# EAGLE board universal_bc202 (EAGLE 9.6.2)
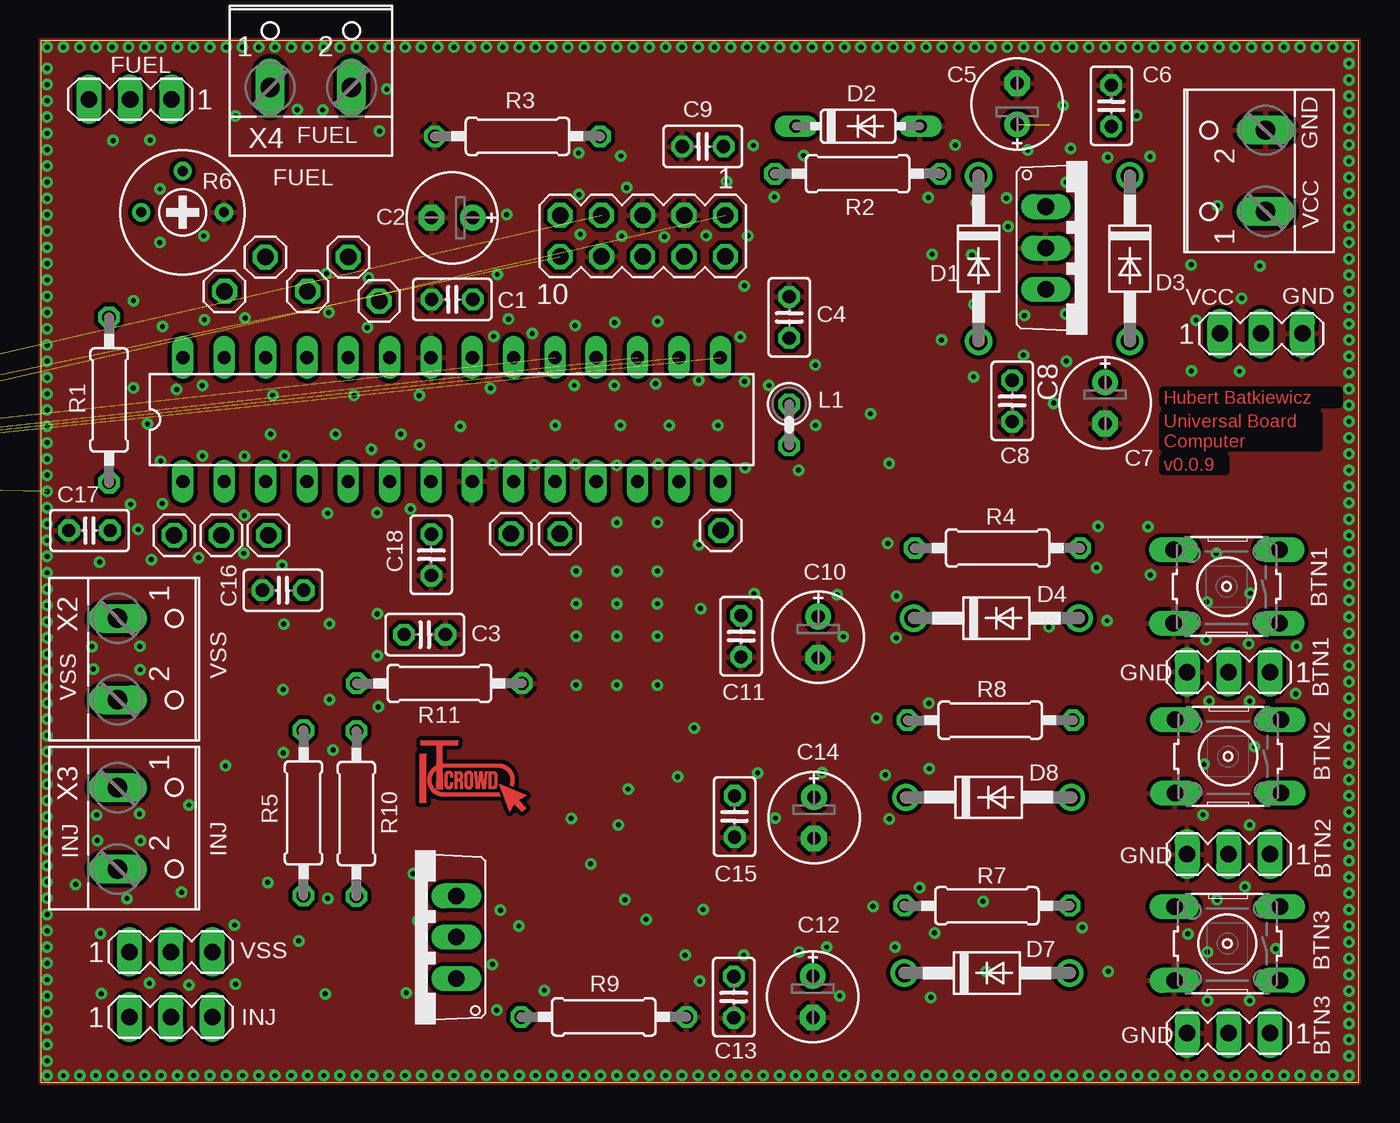
[diagram p0: board, top side]
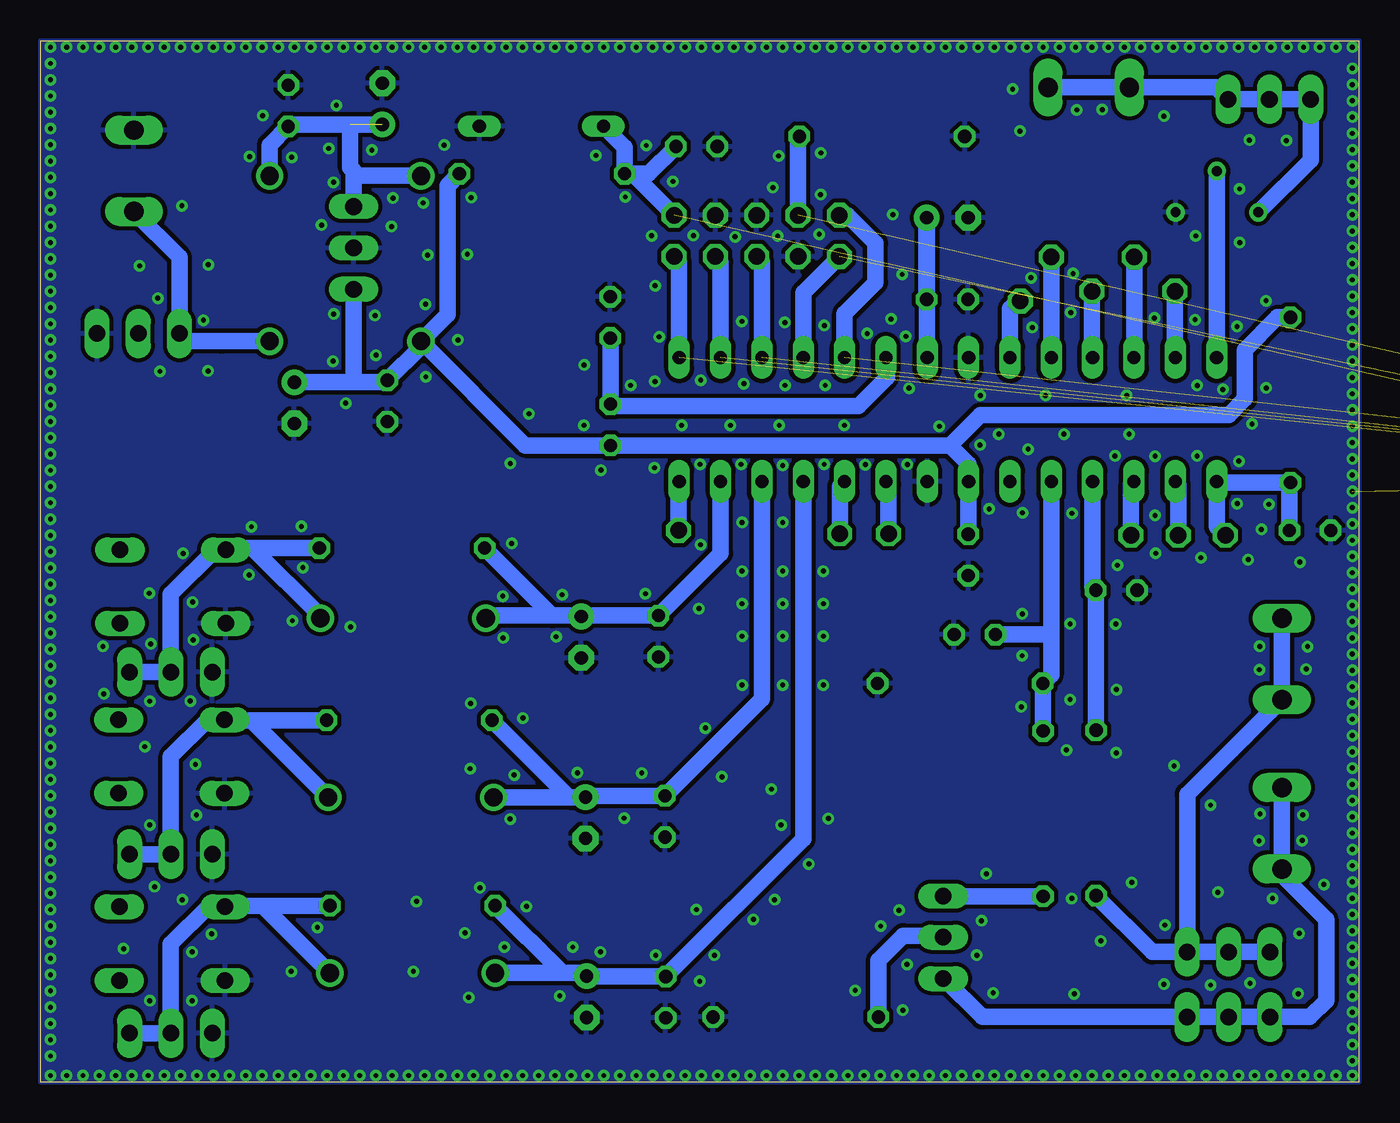
[diagram p1: board, bottom side, seen from below]

Size 81 x 64 mm. Coordinates in mm from the lower left corner, seen from the top.
Outline: 0,0 81,0 81,64 0,64 0,0
Copper layers (1*16): Top 0.035mm / dielectric 1.5mm / Bottom 0.035mm
Design rules "default *": minimum track width 6mil, minimum drill 0.3mm, track to track 10mil, track to pad 10mil, pad to pad 10mil, via to via 10mil, smd to smd 6mil, copper to edge 0mil, drill to drill 10mil, minimum pad ring 10mil, minimum via ring 8mil, stop-mask expansion 4mil, vias tented up to drill 10mil, thermal gap 10mil

## Footprints (pad centres in the part's own frame; a part is rotated, then mirrored left to right if it is on the bottom)
C025-025X050 = drill 0.813 octagon: 1 -1.27,0; 2 1.27,0
E2,5-6E = drill 0.813 pad 1.575: + -1.27,0 | drill 0.813 pad 1.575 octagon: - 1.27,0
DO41-10 = drill 1.118: A 5.08,0; C -5.08,0
DO35-7 = drill 0.813 long: A 3.81,0; C -3.81,0
DIL28-3 = drill 0.813 long: 1 -16.51,-3.81; 2 -13.97,-3.81; 3 -11.43,-3.81; 4 -8.89,-3.81; 5 -6.35,-3.81; 6 -3.81,-3.81; 7 -1.27,-3.81; 8 1.27,-3.81; 9 3.81,-3.81; 10 6.35,-3.81; 11 8.89,-3.81; 12 11.43,-3.81; 13 13.97,-3.81; 14 16.51,-3.81; 15 16.51,3.81; 16 13.97,3.81; 17 11.43,3.81; 18 8.89,3.81; 19 6.35,3.81; 20 3.81,3.81; 21 1.27,3.81; 22 -1.27,3.81; 23 -3.81,3.81; 24 -6.35,3.81; 25 -8.89,3.81; 26 -11.43,3.81; 27 -13.97,3.81; 28 -16.51,3.81
TO220V = drill 1.016 long: 1 -2.54,-2.54; 2 0,-2.54; 3 2.54,-2.54
1X01 = drill 1.016 octagon: 1 0,0
0207/2V = drill 0.813 octagon: 1 -1.27,0; 2 1.27,0
LPH-7366 = smd 0.75 x 4: 1 4,17; 2 3,17; 3 2,17; 4 1,17; 5 0,17; 6 -1,17; 7 -2,17; 8 -3,17; 9 -4,17 | hole 1.5: -17,13; 17,-12.5
0207/10 = drill 0.813 octagon: 1 -5.08,0; 2 5.08,0
RTRIM3339P = drill 0.61: 1 -2.54,0; 2 0,-2.54; 3 2.54,0
B3F-10XX = drill 1.016 long: 1 -3.251,2.261; 2 3.251,2.261; 3 -3.251,-2.261; 4 3.251,-2.261
MA03-1 = drill 1.016 long: 1 -2.54,0; 2 0,0; 3 2.54,0
MA05-2 = drill 1.016 octagon: 1 -5.08,-1.27; 2 -5.08,1.27; 3 -2.54,-1.27; 4 -2.54,1.27; 5 0,-1.27; 6 0,1.27; 7 2.54,-1.27; 8 2.54,1.27; 9 5.08,-1.27; 10 5.08,1.27
W237-102 = drill 1.194 long: 1 -2.5,-1.27; 2 2.5,-1.27

## Placement (x,y rotation side)
C1  100nF  [C025-025X050]  25.29,48.1 180 top
C2  2.2uF  [E2,5-6E]  25.28,53.12 180 top
C3  100nF  [C025-025X050]  23.6,27.5 0 top
C4  100nF  [C025-025X050]  46,47 90 top
C5  470uF  [E2,5-6E]  60.01,60.12 90 top
C6  100nF  [C025-025X050]  65.79,60 90 top
C7  2.2uF  [E2,5-6E]  65.41,41.74 270 top
C8  100nF  [C025-025X050]  59.7,41.86 270 top
C9  100nF  [C025-025X050]  40.69,57.5 180 top
C10  2.2uF  [E2,5-6E]  47.78,27.34 270 top
C11  100nF  [C025-025X050]  43.04,27.4 270 top
C12  2.2uF  [E2,5-6E]  47.45,5.24 270 top
C13  100nF  [C025-025X050]  42.59,5.22 270 top
C14  2.2uF  [E2,5-6E]  47.52,16.24 270 top
C15  100nF  [C025-025X050]  42.64,16.32 270 top
C16  100nF  [C025-025X050]  14.89,30.22 0 top
C17  10nF  [C025-025X050]  3,33.9 180 top
C18  100nF  [C025-025X050]  24,32.4 270 top
D1  1N4004  [DO41-10]  57.63,50.61 270 top
D2  1N4148  [DO35-7]  50.23,58.74 0 top
D3  1N4004  [DO41-10]  66.93,50.61 270 top
D4  1N4004  [DO41-10]  58.73,28.51 0 top
D7  1N4004  [DO41-10]  58.15,6.7 0 top
D8  1N4004  [DO41-10]  58.25,17.5 0 top
IC1  MEGA8-P  [DIL28-3]  25.25,40.72 0 top
IC2  7805TV  [TO220V]  64.31,51.26 270 top
IC3  7810CV  [TO220V]  23,8.9 90 top
JP2  [1X01]  18.9,50.7 0 top
JP4  [1X01]  16.4,48.6 0 top
JP6  [1X01]  13.8,50.7 0 top
JP8  [1X01]  11.3,48.6 0 top
JP10  [1X01]  8.2,33.6 0 top
JP12  [1X01]  41.8,33.9 0 top
JP14  [1X01]  31.9,33.7 0 top
JP16  [1X01]  28.9,33.7 0 top
JP18  [1X01]  14,33.6 0 top
JP20  [1X01]  11.1,33.6 0 top
JP21  [1X01]  20.8,48 0 top
L1  10uH  [0207/2V]  45.99,40.39 270 top
LCD1  LPH-7366  [LPH-7366]  -33.02,20.05 0 top  (outside the outline)
R1  10K  [0207/10]  4.2,41.92 270 top
R2  220R  [0207/10]  50.2,55.82 180 top
R3  10K  [0207/10]  29.3,58.12 180 top
R4  10K  [0207/10]  58.8,32.82 0 top
R5  10K  [0207/10]  16.15,16.54 90 top
R6  100K  [RTRIM3339P]  8.72,53.45 180 top
R7  10K  [0207/10]  58.15,10.84 0 top
R8  10K  [0207/10]  58.35,22.24 0 top
R9  47K  [0207/10]  34.6,4 0 top
R10  10K  [0207/10]  24.5,24.5 0 top
R11  10K  [0207/10]  19.4,16.5 90 top
S1  [B3F-10XX]  72.88,30.45 180 top
S2  [B3F-10XX]  72.92,8.51 180 top
S3  [B3F-10XX]  72.96,20.01 180 top
SV1  [MA03-1]  75,46 0 top
SV2  [MA03-1]  8,8 0 top
SV3  [MA03-1]  8,4 0 top
SV4  [MA05-2]  37,52 180 top
SV5  [MA03-1]  5.5,60.4 180 top
SV6  [MA03-1]  73,14 180 top
SV7  [MA03-1]  73,25.2 180 top
SV8  [MA03-1]  73,3 180 top
X1  [W237-102]  74,56 90 top
X2  [W237-102]  6,26 270 top
X3  [W237-102]  6,15.6 270 top
X4  [W237-102]  16.6,62.4 0 top

## Library data of the parts
C1-C18 = rcl; SPICEPREFIX: C
D1-D4 D7 D8 = diode
IC1 = atmel; OC_FARNELL: unknown; OC_NEWARK: unknown
IC2 IC3 = linear
JP2 JP4 JP6 JP8 JP10 JP12 JP14 JP16 JP18 JP20 JP21 = pinhead
L1 = rcl; SPICEPREFIX: L
LCD1 = lph-7366
R1-R5 R7-R11 = rcl; SPICEPREFIX: R
R6 = rcl; SPICEMODEL: X; SPICEPREFIXL: POT
S1-S3 = switch-omron; MPN: B3F-1000; OC_FARNELL: 176432; OC_NEWARK: 36M3542
SV1-SV8 = con-lstb; OC_FARNELL: unknown; OC_NEWARK: unknown
X1-X4 = con-wago-500; MPN: 237-102; OC_FARNELL: unknown; OC_NEWARK: 70K9898

## Nets
+3V3: C9.1 D2.C LCD1.1 R2.2 SV4.1
CLK: IC1.15 LCD1.2 SV4.2
CS: IC1.18 LCD1.5 SV4.10
D/C: IC1.17 LCD1.4 SV4.6
DIN: IC1.16 LCD1.3 SV4.4
FLOAT: R6.3 SV5.1 SV5.2 SV5.3 X4.1 X4.2
FUEL: IC1.28 R6.2
FUN: C14.+ C15.1 D8.C IC1.12 R8.1
GND: C1.2 C2.- C3.2 C4.2 C5.- C6.2 C7.- C8.2 C9.2 C10.- C11.2 C12.- C13.2 C14.- C15.2 C16.1 C17.2 C18.2 D2.A IC1.8 IC1.22 IC2.2 LCD1.7 R3.2 R6.1 R9.2 R10.2 S1.2 S2.2 S3.2 SV1.3 SV4.3 SV4.5 SV4.8 SV6.3 SV7.3 SV8.3 X1.2
INJECTOR: C3.1 IC1.5 R10.1 R11.2
N$2: C1.1 C2.+ IC1.21
N$3: C4.1 IC1.20 L1.1
N$4: C5.+ C6.1 D1.C D3.C IC2.1
N$7: IC3.1 SV3.1 SV3.2 SV3.3 X3.1 X3.2
N$10: D4.A R4.2 S1.4 SV7.1 SV7.2
N$14: D7.A R7.2 S2.4 SV8.1 SV8.2
N$16: D8.A R8.2 S3.4 SV6.1 SV6.2
N$19: D3.A SV1.1 X1.1
N$20: R5.1 SV2.1 SV2.2 SV2.3 X2.1 X2.2
N$21: IC3.2 R9.1
N$22: IC3.3 R11.1
NEXT: C10.+ C11.1 D4.C IC1.13 R4.1
PB0: IC1.14 JP12.1
PB6: IC1.9 JP16.1
PB7: IC1.10 JP14.1
PC0: IC1.23 JP21.1
PC1: IC1.24 JP2.1
PC2: IC1.25 JP4.1
PC3: IC1.26 JP6.1
PC4: IC1.27 JP8.1
PC6: C17.1 IC1.1 JP10.1 R1.2
PD0: IC1.2 JP20.1
PD1: IC1.3 JP18.1
PREV: C12.+ C13.1 D7.C IC1.11 R7.1
RST: IC1.19 LCD1.9 SV4.9
VCC: C7.+ C8.1 C18.1 D1.A IC1.7 IC2.3 L1.2 R1.1 R2.1
VOUT: LCD1.8 R3.1 SV4.7
VSS: C16.2 IC1.4 R5.2

## Tracks (layer width: path | path; a pad name or v marks a point on that pad's centre or on a via)
+3V3  (1 unrouted)
  Bottom 1.016: D2.C 45.12,57.44 R2.2 | C9.1 43.64,55.82 R2.2 | SV4.1 44.63,55.82 R2.2
CLK  (1 unrouted)
  Bottom 1.016: SV4.2 41.76,50.41 IC1.15
CS  (1 unrouted)
  Bottom 1.016: IC1.18 34.14,48 34.14,48.51 SV4.10
D/C  (1 unrouted)
  Bottom 1.016: IC1.17 36.68,50.41 SV4.6
DIN  (1 unrouted)
  Bottom 1.016: IC1.16 39.22,50.41 SV4.4
FLOAT
  Bottom 1.016: R6.3 2.96,56.67 SV5.3 SV5.2 SV5.1 8.77,61.13 X4.1 X4.2
FUEL
  Bottom 1.016: IC1.28 8.72,44.55 R6.2
FUN
  Bottom 1.016: 48.54,17.51 D8.C | R8.1 48.54,17.51 | 48.54,17.51 C14.+ 47.44,17.59 C15.1 36.68,23.55 IC1.12
GND  (via drill 0.3)  (1 unrouted)
  other vias: 0.4,63.6 1.4,63.6 2.4,63.6 4.4,63.6 3.4,63.6 5.4,63.6 6.4,63.6 7.4,63.6 8.4,63.6 9.4,63.6 10.4,63.6 12.4,63.6 11.4,63.6 13.4,63.6 14.4,63.6 15.4,63.6 16.4,63.6 17.4,63.6 18.4,63.6 20.4,63.6 19.4,63.6 21.4,63.6 22.4,63.6 23.4,63.6 24.4,63.6 25.4,63.6 26.4,63.6 28.4,63.6 27.4,63.6 29.4,63.6 30.4,63.6 31.4,63.6 32.4,63.6 33.4,63.6 34.4,63.6 36.4,63.6 35.4,63.6 37.4,63.6 38.4,63.6 39.4,63.6 40.4,63.6 41.4,63.6 42.4,63.6 44.4,63.6 43.4,63.6 45.4,63.6 46.4,63.6 47.4,63.6 48.4,63.6 49.4,63.6 50.4,63.6 52.4,63.6 51.4,63.6 53.4,63.6 54.4,63.6 55.4,63.6 56.4,63.6 57.4,63.6 58.4,63.6 60.4,63.6 59.4,63.6 61.4,63.6 62.4,63.6 63.4,63.6 64.4,63.6 65.4,63.6 66.4,63.6 68.4,63.6 67.4,63.6 69.4,63.6 70.4,63.6 71.4,63.6 72.4,63.6 73.4,63.6 74.4,63.6 76.4,63.6 75.4,63.6 77.4,63.6 78.4,63.6 79.4,63.6 80.4,63.6 0.4,2.3 0.4,1.3 0.4,3.3 0.4,4.3 0.4,5.3 0.4,6.3 0.4,7.3 0.4,8.3 0.4,10.3 0.4,9.3 0.4,11.3 0.4,12.3 0.4,13.3 0.4,14.3 0.4,15.3 0.4,16.3 0.4,18.3 0.4,17.3 0.4,19.3 0.4,20.3 0.4,21.3 0.4,22.3 0.4,23.3 0.4,24.3 0.4,26.3 0.4,25.3 0.4,27.3 0.4,28.3 0.4,29.3 0.4,30.3 0.4,31.3 0.4,32.3 0.4,34.3 0.4,33.3 0.4,35.3 0.4,36.3 0.4,37.3 0.4,38.3 0.4,39.3 0.4,40.3 0.4,42.3 0.4,41.3 0.4,43.3 0.4,44.3 0.4,45.3 0.4,46.3 0.4,47.3 0.4,48.3 0.4,50.3 0.4,49.3 0.4,51.3 0.4,52.3 0.4,53.3 0.4,54.3 0.4,55.3 0.4,56.3 0.4,58.3 0.4,57.3 0.4,59.3 0.4,60.3 0.4,61.3 0.4,62.3 0.4,0.4 1.4,0.4 2.4,0.4 4.4,0.4 3.4,0.4 5.4,0.4 6.4,0.4 7.4,0.4 8.4,0.4 9.4,0.4 10.4,0.4 12.4,0.4 11.4,0.4 13.4,0.4 14.4,0.4 15.4,0.4 16.4,0.4 17.4,0.4 18.4,0.4 20.4,0.4 19.4,0.4 21.4,0.4 22.4,0.4 23.4,0.4 24.4,0.4 25.4,0.4 26.4,0.4 28.4,0.4 27.4,0.4 29.4,0.4 30.4,0.4 31.4,0.4 32.4,0.4 33.4,0.4 34.4,0.4 36.4,0.4 35.4,0.4 37.4,0.4 38.4,0.4 39.4,0.4 40.4,0.4 41.4,0.4 42.4,0.4 44.4,0.4 43.4,0.4 45.4,0.4 46.4,0.4 47.4,0.4 48.4,0.4 49.4,0.4 50.4,0.4 52.4,0.4 51.4,0.4 53.4,0.4 54.4,0.4 55.4,0.4 56.4,0.4 57.4,0.4 58.4,0.4 60.4,0.4 59.4,0.4 61.4,0.4 62.4,0.4 63.4,0.4 64.4,0.4 65.4,0.4 66.4,0.4 68.4,0.4 67.4,0.4 69.4,0.4 70.4,0.4 71.4,0.4 72.4,0.4 73.4,0.4 74.4,0.4 76.4,0.4 75.4,0.4 77.4,0.4 78.4,0.4 79.4,0.4 80.4,0.4 80.4,2.6 80.4,1.6 80.4,3.6 80.4,4.6 80.4,5.6 80.4,6.6 80.4,7.6 80.4,8.6 80.4,10.6 80.4,9.6 80.4,11.6 80.4,12.6 80.4,13.6 80.4,14.6 80.4,15.6 80.4,16.6 80.4,18.6 80.4,17.6 80.4,19.6 80.4,20.6 80.4,21.6 80.4,22.6 80.4,23.6 80.4,24.6 80.4,26.6 80.4,25.6 80.4,27.6 80.4,28.6 80.4,29.6 80.4,30.6 80.4,31.6 80.4,32.6 80.4,34.6 80.4,33.6 80.4,35.6 80.4,36.6 80.4,37.6 80.4,38.6 80.4,39.6 80.4,40.6 80.4,42.6 80.4,41.6 80.4,43.6 80.4,44.6 80.4,45.6 80.4,46.6 80.4,47.6 80.4,48.6 80.4,50.6 80.4,49.6 80.4,51.6 80.4,52.6 80.4,53.6 80.4,54.6 80.4,55.6 80.4,56.6 80.4,58.6 80.4,57.6 80.4,59.6 80.4,60.6 80.4,61.6 80.4,62.6 74.3,5 71.7,5 71.7,8 70.5,9.1 72.3,11.2 74,12 74.3,15.8 75.9,8.2 65.6,6.8 64,9.5 52.5,8.3 48.3,8.3 49.1,5.3 54.7,5.2 57.9,11.1 58.1,6.8 43.2,7.8 46.6,8 40.5,6.2 39.6,7.8 37.2,10 35.9,11.2 33.8,13.4 32.6,16.2 35.5,15.8 40.7,10.6 36.1,18 35.4,24.4 37.9,24.4 32.9,24.4 32.9,27.4 35.4,27.4 37.9,27.4 37.9,29.4 35.4,29.4 32.9,29.4 32.9,31.4 35.4,31.4 37.9,31.4 37.9,34.4 35.4,34.4 35.4,37.9 37.96,37.97 32.85,37.97 30.33,37.95 27.75,37.96 23.28,39.15 25.78,40.3 22.12,39.82 18.12,39.82 14.12,39.82 14.26,42.19 19.26,42.19 23.26,42.19 8.35,42.56 6.56,40.45 5.69,42.66 7.37,38.16 5.53,35.51 7.47,35.55 9.94,38.48 9.93,42.81 10.06,46.85 12.56,46.96 7.48,46.44 5.7,48.02 7.33,54.89 7.32,51.6 6.72,57.89 4.45,57.86 15.77,59.76 17.33,59.74 11.98,59.36 21.27,61.02 20.82,58.44 28.64,53.31 28.06,49.64 28.75,46.9 20.06,46.37 20.15,49.43 17.56,49.69 17.7,47.29 30.21,46 27.84,45.83 27.64,42.64 31.62,40.36 35.62,40.36 38.62,40.36 41.62,40.36 47.62,40.36 44.75,42.82 40.44,43.13 37.79,42.92 35.26,42.82 32.79,42.82 32.84,46.5 35.27,46.68 37.91,46.75 33.16,52.11 35.71,51.99 38.33,51.95 40.89,52.02 43.46,52.01 43.24,48.94 43,45.8 43.26,43.05 47.61,44.07 55.36,45.61 57.33,43.34 52.14,38.02 51,41.07 46.57,37.61 43.29,37.75 40.48,37.97 20.32,38.9 22.72,35.22 17.63,34.96 14.99,38.48 12.52,38.47 12.52,34.83 12.48,32.5 9.7,32.22 6.8,32.11 5.99,33.96 3.62,31.96 6.09,26.78 6.11,25.34 3.15,26.77 3.23,25.38 11.35,19.44 9.11,17.02 6.07,16.49 6.13,14.83 3.44,16.42 3.48,14.85 2.15,12.15 5.3,11.29 8.66,11.66 11.92,9.65 3.67,9.13 3.73,5.43 6.68,6.07 9.11,5.96 11.98,6.02 23.47,7.8 23.19,9.91 22.47,5.48 17.48,5.42 28.26,10.56 27.76,7.23 29.38,9.59 30.95,5.63 28.02,4.42 22.89,12.8 17.64,11.28 13.95,12.27 15.86,8.68 57.5,54.03 59.35,54.33 57.35,47.8 60.39,44.67 60.46,47.11 62.99,47.2 63.04,44.3 62.26,41.72 54.55,54.36 56.21,57.58 46.88,56.95 43.79,57.56 42.15,55.35 45.08,54.4 33.06,57.1 35.66,56.92 71,46.82 73.8,48.17 73.67,43.68 70.71,43.7 72.32,53.85 70.7,50.23 74.92,50.16 52.6,29.87 52.06,33.11 48.96,29.95 49.32,27.37 52.58,27.3 43.84,30.01 40.45,33.02 40.55,29.1 44.06,18.99 48.01,19.01 51.9,18.87 52.15,16.17 45.15,16.22 39.14,18.76 40.15,21.76 51.15,10.79 54.01,11.94 54.93,9.17 54.61,19.26 54.58,23.28 51.36,22.37 64.89,31.62 68.05,34.13 64.98,34.15 68.2,31.17 65.53,28.35 61.96,27.98 71.66,29.5 74.33,30.04 72.25,32.49 74.23,26.93 71.62,27.18 77.17,26.78 77.12,23.86 74.29,23.41 71.81,23.42 74.6,20.61 71.49,19.53 71.43,16.41 14.83,31.76 14.94,28.15 17.74,28.16 14.89,24.12 17.74,23.51 17.97,20.41 14.9,20.23 20.74,23.06 20.69,26.2 20.68,28.77 20.67,34.99 62.83,60.03 60.65,57.28 63.3,57.38 65.57,56.83 68.17,56.88 67.35,59.4 63.74,52.67 59.44,52.58 63.01,55.3 57.22,50.83 54.78,50.88 33.08,54.54 36.01,54.97 10.02,52
  pour Bottom: 0,64 0,0 81,0 81,64
  pour Top: 0,64 0,0 81,0 81,64
INJECTOR
  Bottom 1.016: IC1.5 18.9,27.5 | 18.9,27.5 18.9,25.02 R10.1 19.42,21.6 R11.2 | C3.1 18.9,27.5
N$2
  Bottom 1.016: IC1.21 26.55,44.56 C2.+ C1.1
N$3
  Bottom 1.016: IC1.20 29,44.47 29,43.3 30.74,41.56 45.89,41.56 L1.1 C4.1
N$4  (1 unrouted)
  Bottom 1.016: C5.+ 61.97,58.85 61.97,56.2 61.77,56 | 62,58.85 65.67,58.85 C6.1 66.93,57.59 D3.C | IC2.1 61.77,56 | D1.C 61.46,55.69 61.77,56
N$7
  Bottom 1.016: IC3.1 25.5,6.36 23.14,4 SV3.3 SV3.2 SV3.1 3,4 2,5 2,10 4.73,12.73 X3.2 X3.1
N$10
  Bottom 1.016: R4.2 68,32.82 | 68,32.82 69.52,32.82 S1.4 70.29,32.71 73,30 SV7.2 SV7.1 | D4.A 63.81,28.63 68,32.82
N$14
  Bottom 1.016: R7.2 67.37,10.84 | 67.37,10.84 69.6,10.84 | 69.6,10.84 S2.4 | D7.A 67.37,10.84 | SV8.1 SV8.2 73,8.5 70.66,10.84 69.6,10.84
N$16
  Bottom 1.016: R8.2 68,22.24 | 68,22.24 69.68,22.24 | 69.68,22.24 S3.4 | D8.A 68,22.17 68,22.24 | SV6.1 SV6.2 73,20 70.76,22.24 69.68,22.24
N$19
  Bottom 1.016: D3.A 69.87,45.53 71.99,45.53 SV1.1 72.46,50.69 X1.1
N$20
  Bottom 1.016: SV2.3 12.69,8 R5.1 | SV2.1 SV2.2 SV2.3 | SV2.3 10.54,17.69 X2.2 X2.1
N$21
  Bottom 1.016: R9.1 29.52,7.48 28,9 25.64,9 IC3.2
N$22
  Bottom 1.016: R11.1 25.52,11.42 IC3.3
NEXT
  Bottom 1.016: IC1.13 39.22,32.49 C11.1 47.72,28.67 | 47.72,28.67 C10.+ | 47.72,28.67 49.57,28.67 | 49.57,28.67 53.49,28.67 D4.C | R4.1 49.57,28.67
PB0
  Bottom 1.016: IC1.14 41.8,36.87 JP12.1
PB6
  Bottom 1.016: JP16.1 28.9,36.75 IC1.9
PB7
  Bottom 1.016: JP14.1 31.9,36.61 IC1.10
PC0
  Bottom 1.016: JP21.1 20.97,48 21.44,47.53 IC1.23
PC1
  Bottom 1.016: JP2.1 IC1.24
PC2
  Bottom 1.016: JP4.1 16.4,44.57 IC1.25
PC3
  Bottom 1.016: JP6.1 13.8,44.55 IC1.26
PC4
  Bottom 1.016: JP8.1 11.3,44.55 IC1.27
PC6
  Bottom 1.016: JP10.1 8.74,34.14 IC1.1 8.67,36.84 R1.2 4.27,36.77 C17.1
PD0
  Bottom 1.016: JP20.1 11.1,36.73 IC1.2
PD1
  Bottom 1.016: JP18.1 14,36.73 IC1.3
PREV
  Bottom 1.016: D7.C 49,6.7 | 49,6.7 47.64,6.7 C12.+ 47.43,6.49 C13.1 34.14,14.94 IC1.11 | R7.1 49,6.77 49,6.7
RST  (1 unrouted)
  Bottom 1.016: IC1.19 31.6,47.24 29.7,49.14 29.7,51.55 31.42,53.27 SV4.9
VCC
  Bottom 0.152: IC1.7 24,36.89
  Bottom 1.016: C7.+ 61.77,43.01 | 61.77,43.01 59.82,43.01 C8.1 57.63,45.2 D1.A | IC2.3 61.77,43.01 | D1.A 51.22,39.12 L1.2 25.12,39.12 | IC1.7 23.98,37.98 25.12,39.12 | 25.12,39.12 23.24,41 8,41 7,42 7,45 5,47 R1.1 | R2.1 56,55.1 56,47.16 D1.A | 24,36.89 C18.1
VOUT  (1 unrouted)
  Bottom 1.016: SV4.7 34.46,58.04 R3.1
VSS
  Bottom 1.016: R5.2 C16.2 16.36,30.42 IC1.4
(copper drawn outside any net)
  shapes: Top area x2443

## Text on the board
Top: Hubert Batkiewicz | Universal Board / Computer | v0.0.9
tPlace: FUEL | C5 | C6 | R3 | C9 | D2 | FUEL | GND | FUEL | R6 | C2 | R2 | VCC | D1 | D3 | VCC | C1 | GND | C4 | R1 | L1 | C8 | C7 | C17 | R4 | C18 | C10 | D4 | C16 | BTN1 | C3 | VSS | GND | R8 | BTN1 | VSS | C11 | R11 | C14 | D8 | BTN2 | R10 | R5 | INJ | INJ | GND | BTN2 | C15 | R7 | C12 | VSS | D7 | BTN3 | R9 | INJ | GND | BTN3 | C13